# Altium PCB acqboard.PcbDoc (part 4 of 5)
Units mil, origin at the board's own origin, x right, y up, seen from the top; angles counter-clockwise.
Board outline 7000 x 5250 mil, 4 copper layers (Top Layer, Internal Plane 1, Internal Plane 2, Bottom Layer); 629 components, 384 nets, 2086 pads, 785 vias.
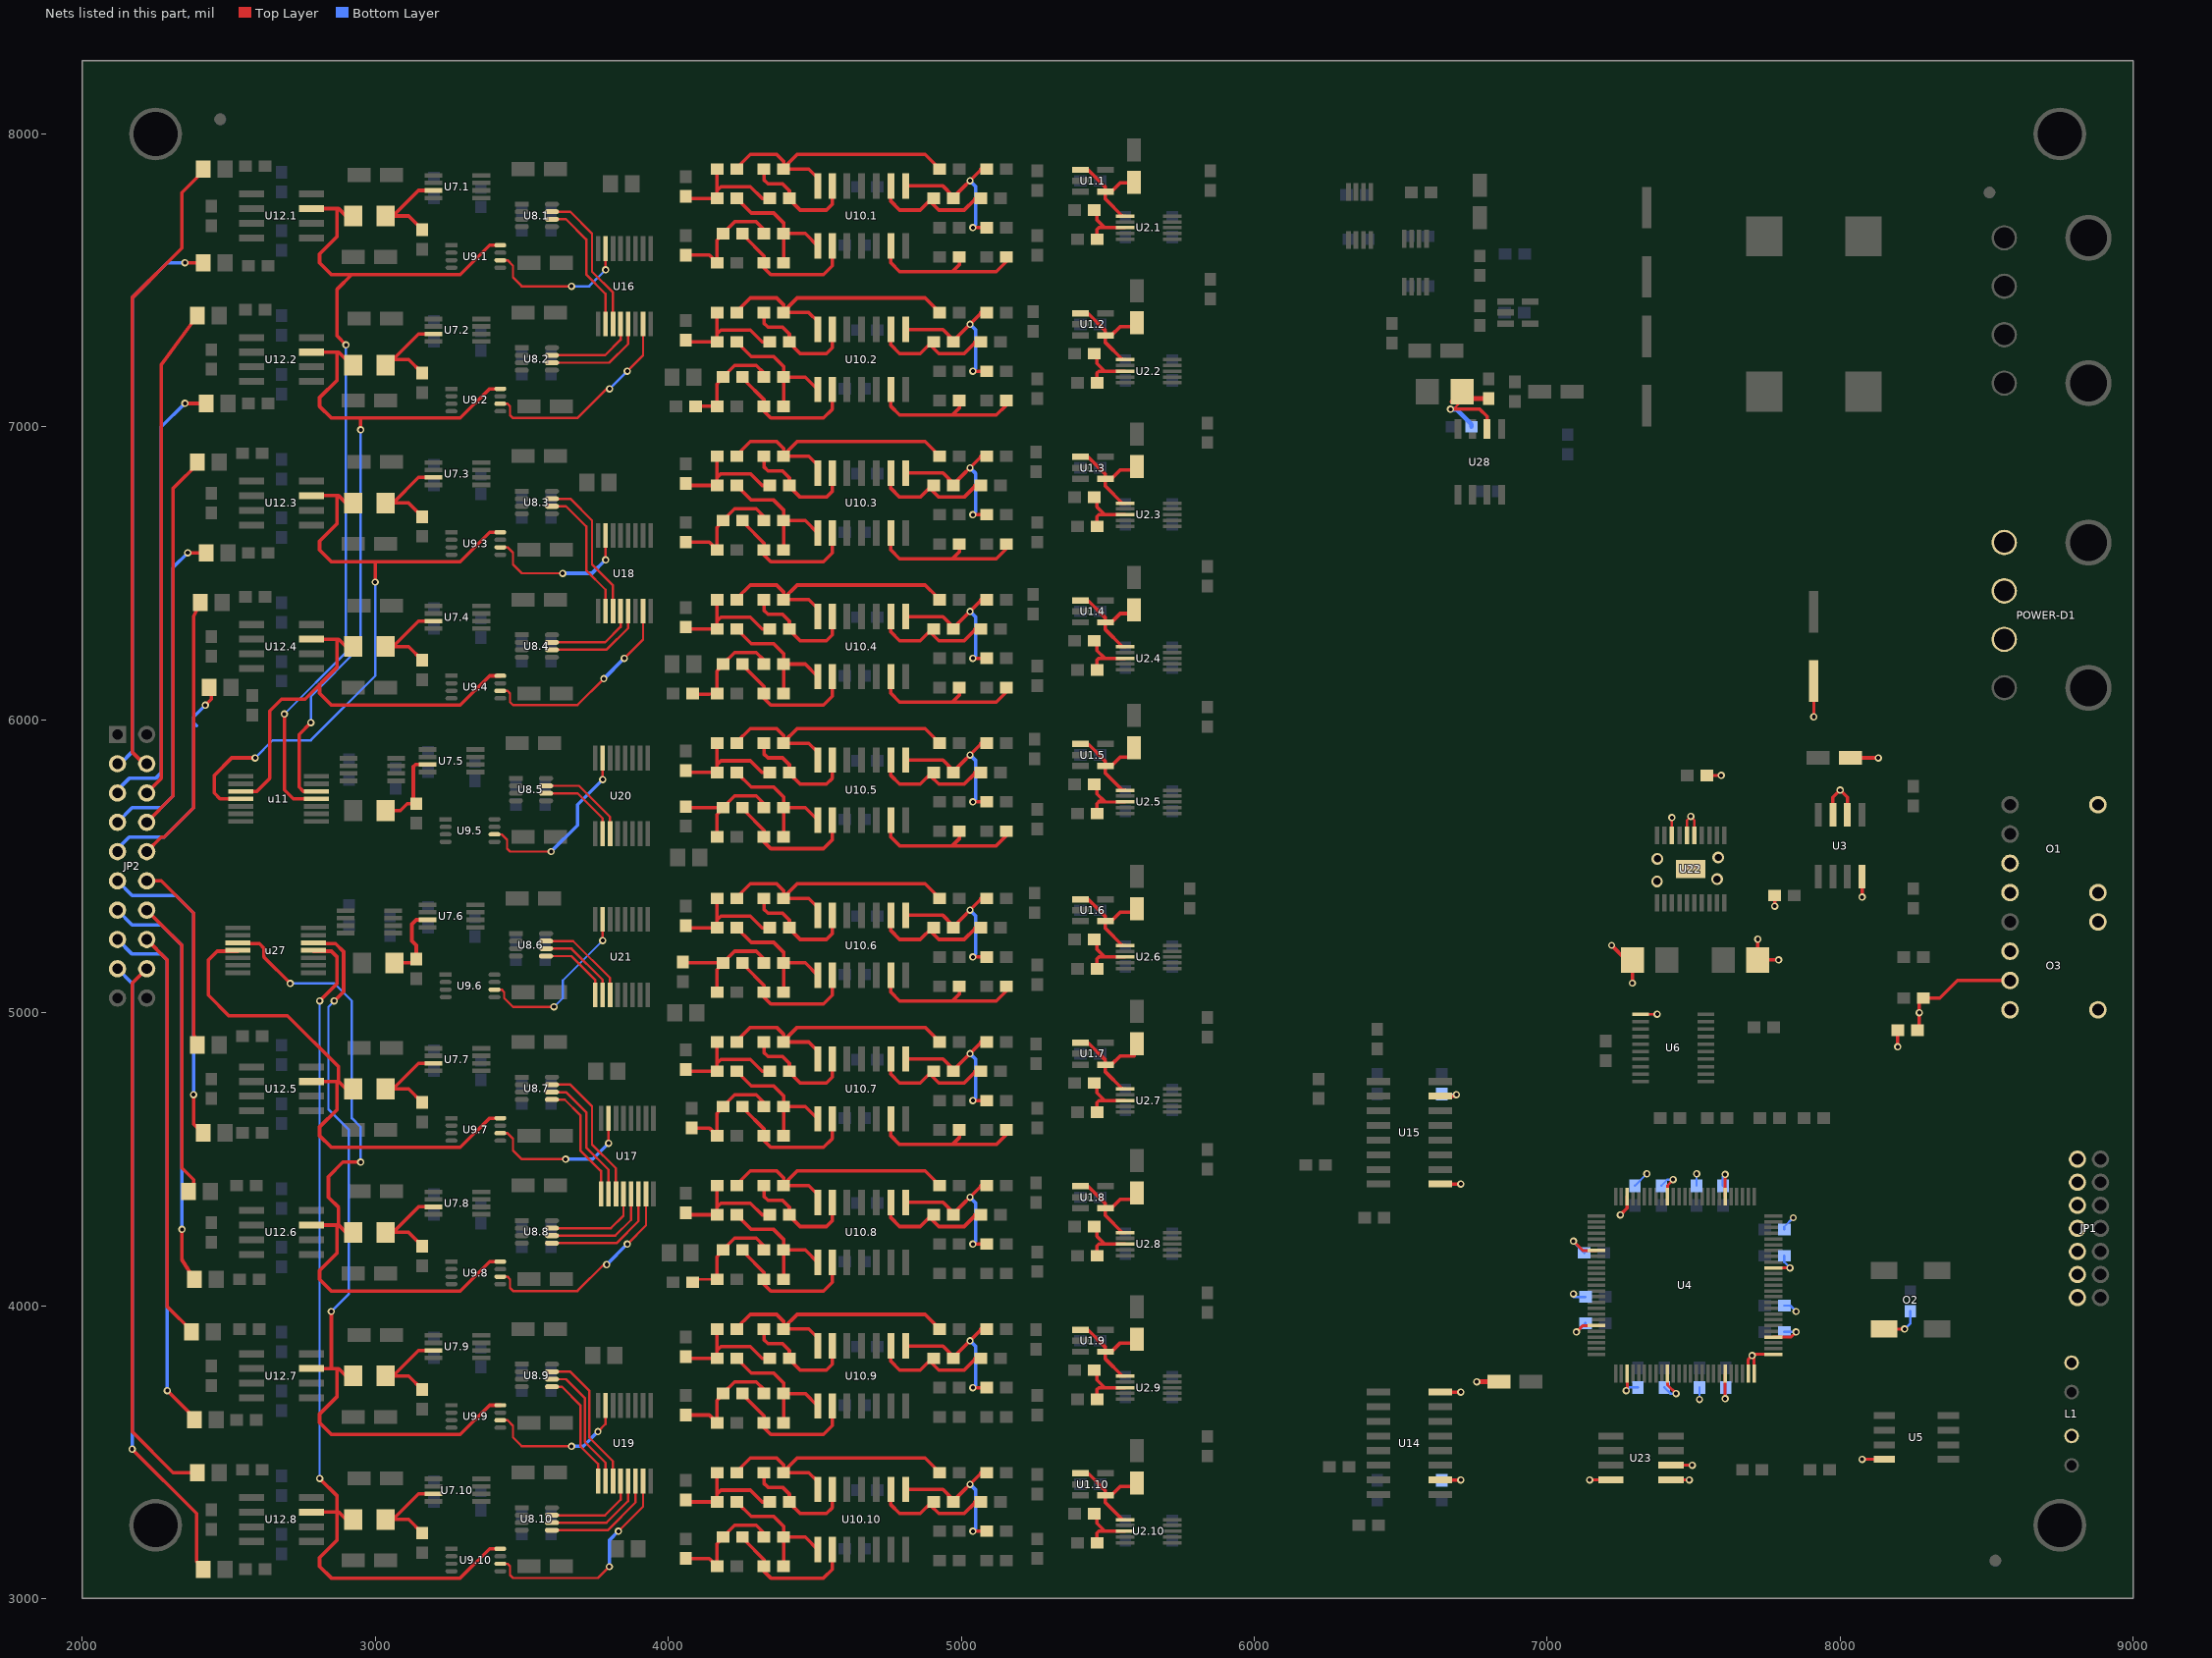
[diagram p6: the nets of this part, all layers, seen from the top]

## Via types
v1: diameter 25, hole 13.5, Top Layer to Bottom Layer, 768 vias
v2: diameter 40, hole 20, Top Layer to Bottom Layer, 13 vias
v3: diameter 40, hole 25, Top Layer to Bottom Layer, 4 vias

## Nets (pads, with @x,y where several pads share a name; then routed paths per layer and width w, separated by ;. In a path a pad name is that pad's centre, name@x,y a point inside that pad or via, vN(x,y) a via of type N, cw(c..) or ccw(c..) an arc to the next point about the centre after c; other vN are vias at no path point) (continued)
GA6: U8.6.5 U21.1 | length 252.3
  Top Layer w8: U8.6.5@3583.15,5193.23 3670,5193.23 3750.43,5112.8 U21.1@3750.43,5061.06
GA7: U8.7.5 U17.1 | length 417
  Top Layer w8: U8.7.5@3603.15,4703.23 3646.77,4703.23 3700,4650 3700,4530 3770.43,4459.57 U17.1@3770.43,4381.06
GA8: U8.8.5 U17.6 | length 419
  Top Layer w8: U8.8.5@3603.15,4213.23 3823.23,4213.23 3898.39,4288.39 U17.6@3898.39,4381.06
GA9: U8.9.5 U19.1 | length 407
  Top Layer w8: U8.9.5@3603.15,3723.23 3636.77,3723.23 3700,3660 3700,3520 3760.43,3459.57 U19.1@3760.43,3401.06
GA10: U8.10.5 U19.6 | length 397.3
  Top Layer w8: U8.10.5@3603.15,3233.23 3793.23,3233.23 3888.39,3328.39 U19.6@3888.39,3401.06
GB1: U8.1.6 U16.2 | length 461.6
  Top Layer w8: U8.1.6@3603.15,7708.82 3651.18,7708.82 3720,7640 3720,7520 3786.02,7453.98 U16.2@3786.02,7351.06
GB2: U8.2.6 U16.5 | length 354.4
  Top Layer w8: U8.2.6@3603.15,7218.82 3798.82,7218.82 3862.8,7282.8 U16.5@3862.8,7351.06
GB3: U8.3.6 U18.2 | length 461.6
  Top Layer w8: U8.3.6@3603.15,6728.82 3651.18,6728.82 3720,6660 3720,6510 3786.02,6443.98 U18.2@3786.02,6371.06
GB4: U8.4.6 U18.5 | length 361.2
  Top Layer w8: U8.4.6@3590,6240 3790,6240 3862.8,6312.8 U18.5@3862.8,6371.06
GB5: U8.5.6 U20.2 | length 280.9
  Top Layer w8: U8.5.6@3583.15,5748.82 3691.18,5748.82 3776.02,5663.98 U20.2@3776.02,5611.06
GB6: U8.6.6 U21.2 | length 288.5
  Top Layer w8: U8.6.6@3583.15,5218.82 3670,5218.82 3776.02,5112.79 U21.2@3776.02,5061.06
GB7: U8.7.6 U17.2 | length 455.8
  Top Layer w8: U8.7.6@3603.15,4728.82 3651.18,4728.82 3720,4660 3720,4540 3796.02,4463.98 U17.2@3796.02,4381.06
GB8: U8.8.6 U17.5 | length 380.3
  Top Layer w8: U8.8.6@3603.15,4238.82 3818.82,4238.82 3872.8,4292.8 U17.5@3872.8,4381.06
GB9: U8.9.6 U19.2 | length 451.6
  Top Layer w8: U8.9.6@3603.15,3748.82 3651.18,3748.82 3715,3685 3715,3535 3786.02,3463.98 U19.2@3786.02,3401.06
GB10: U8.10.6 U19.5 | length 358.6
  Top Layer w8: U8.10.6@3603.15,3258.82 3788.82,3258.82 3862.8,3332.8 U19.5@3862.8,3401.06
GC1: U8.1.7 U16.3 | length 506.3
  Top Layer w8: U8.1.7@3603.15,7734.41 3665.59,7734.41 3740,7660 3740,7530 3811.61,7458.39 U16.3@3811.61,7351.06
GC2: U8.2.7 U16.4 | length 309.8
  Top Layer w8: U8.2.7@3603.15,7244.41 3784.41,7244.41 3837.2,7297.2 U16.4@3837.2,7351.06
GC3: U8.3.7 U18.3 | length 506.3
  Top Layer w8: U8.3.7@3603.15,6754.41 3665.59,6754.41 3740,6680 3740,6530 3811.61,6458.39 U18.3@3811.61,6371.06
GC4: U8.4.7 U18.4 | length 309.8
  Top Layer w8: U8.4.7@3603.15,6264.41 3784.41,6264.41 3837.2,6317.2 U18.4@3837.2,6371.06
GC5: U8.5.7 U20.3 | length 319.7
  Top Layer w8: U8.5.7@3583.15,5774.41 3695.59,5774.41 3801.61,5668.39 U20.3@3801.61,5611.06
GC6: U8.6.7 U21.3 | length 328
  Top Layer w8: U8.6.7@3583.15,5244.41 3675.59,5244.41 3801.61,5118.39 U21.3@3801.61,5061.06
GC7: U8.7.7 U17.3 | length 500.4
  Top Layer w8: U8.7.7@3603.15,4754.41 3665.59,4754.41 3740,4680 3740,4550 3821.61,4468.39 U17.3@3821.61,4381.06
GC8: U8.8.7 U17.4 | length 335.6
  Top Layer w8: U8.8.7@3603.15,4264.41 3804.41,4264.41 3847.2,4307.2 U17.4@3847.2,4381.06
GC9: U8.9.7 U19.3 | length 496.3
  Top Layer w8: U8.9.7@3603.15,3774.41 3665.59,3774.41 3730,3710 3730,3550 3811.61,3468.39 U19.3@3811.61,3401.06
GC10: U8.10.7 U19.4 | length 319.8
  Top Layer w8: U8.10.7@3603.15,3284.41 3784.41,3284.41 3837.2,3337.2 U19.4@3837.2,3401.06
GND: C8.2 C9.2 C10.2 C11.2 C12.2 C13.2 C14.2 C15.2 C16.2 C17.2 C18.2 C19.2 C20.2 C21.2 C22.2 C23.2 C24.2 C25.2 C26.2 C50.1 C52.1 C53.2 C61.2 C62.2 C67.2 C68.2 JP1.1 JP1.3 JP1.5 JP1.7 JP1.9 JP1.11 JP1.13 L1.2 L1.4 O1.3 O1.4 O1.5 O1.8 O2.4 O3.2 O3.4 O3.5 O3.8 POWER-D1.1 POWER-D1.2 POWER-D1.3 U3.4 U3.6 U3.7 U4.3 U4.10 U4.20 U4.24 U4.25 U4.26 U4.29 U4.41 U4.56 U4.66 U4.73 U4.82 U4.95 U5.4 U6.11 U14.2 U14.8 U15.9 U15.15 U22.5 U22.6 U22.8 U22.P1 U23.1 U23.2 U23.8 | length 3729.8
  Top Layer w8: U6.11@7318.78,4995.16 v1(7375.16,4995.16) ; U22.8@7425.8,5605 v1(7425.8,5665.8) ; U22.6@7477,5605 7477,5657 v1(7490,5670) 7502.6,5657.4 U22.5@7502.6,5605
  Top Layer w10: v1(7090,4220) 7121.89,4188.11 U4.82@7167.83,4188.11 ; v1(7100,3910) 7122.2,3932.2 U4.95@7167.83,3932.2 ; v1(7145,3405) U23.8@7217.64,3405 ; v1(7270,3710) 7273.15,3713.15 U4.3@7273.15,3767.83 ; U4.10@7410.94,3767.83 7410.94,3729.06 v1(7440,3700) ; U4.66@7410.94,4372.17 7410.94,4410.94 v1(7430,4430) ; U23.1@7422.36,3405 v1(7485,3405) ; U23.2@7422.36,3455 v1(7495,3455) ; C53.2@7545.46,5810 v1(7594,5810) ; v1(7607.8,3682.2) U4.20@7607.8,3767.83 ; U4.56@7607.8,4372.17 v1(7607.8,4447.8) ; U4.24@7686.54,3767.83 7686.54,3816.54 7703.78,3833.78 U4.26@7772.17,3833.78 ; v1(7700,3830) 7706.22,3823.78 U4.25@7706.22,3767.83 ; U4.29@7772.17,3892.83 7832.83,3892.83 v1(7850,3910) ; U4.41@7772.17,4129.06 v1(7829.06,4129.06) ; v1(7910,6010) C61.2@7910,6131.89 ; v1(8075,3475) U5.4@8150.75,3475 ; O2.4@8150,3920 v1(8220,3920)
  Top Layer w12: U14.2@6635.31,3405 v1(6705,3405) ; U14.8@6635.31,3705 v1(6705,3705) ; U15.9@6635.31,4415 v1(6705,4415) ; U15.15@6635.31,4715 6685,4715 v1(6690,4720) ; v1(7220,5230) 7270,5180 C68.2@7290.94,5180 v1(7290.94,5100.94) ; v1(7250,4310) 7273.15,4333.15 U4.73@7273.15,4372.17 ; v1(7719.06,5250.94) C67.2@7719.06,5180 v1(7790,5180) ; v1(7776.54,5363.46) C8.2@7776.54,5400 ; U3.7@7975,5675.31 7975,5735 v1(8000,5760) 8025,5735 U3.6@8025,5675.31 ; C11.2@8039.06,5870 v1(8130,5870) ; v1(8075,5395) U3.4@8075,5464.69 ; v1(8196.54,4883.46) C10.2@8196.54,4940
  Top Layer w16: v1(6760,3740) C62.2@6830.94,3740
  Bottom Layer w8: C52.1@6640,3403.46 6703.46,3403.46 v1(6705,3405) ; C50.1@6640,4722.22 6642.22,4720 v1(6690,4720) ; v1(6705,4415) v1@6710,4410 ; v1@7090,4030 C22.2@7130.85,4030 ; v1(7090,4220) 7090,4216.54 C12.2@7126.54,4180 ; v1(7100,3910) 7100.85,3910 C13.2@7130.85,3940 ; v1(7270,3710) 7280.85,3720.85 C14.2@7310,3720.85 ; C19.2@7300,4409.15 7300,4410 v1(7340,4450) ; C23.2@7390,4409.15 7390,4410 7410,4430 v1(7430,4430) ; C26.2@7400,3720.85 7420.85,3700 v1(7440,3700) ; v1(7495,3455) v1@7500,3450 ; C24.2@7510,4409.15 v1(7510,4450) ; v1(7520,3680) C21.2@7520,3720.85 ; C18.2@7600,4409.15 7600,4440 v1(7607.8,4447.8) ; v1(7607.8,3682.2) 7610,3684.41 C15.2@7610,3720.85 ; C16.2@7809.15,3910 v1(7850,3910) ; C25.2@7809.15,4000 7830,4000 v1(7850,3980) ; C20.2@7809.15,4170 7809.15,4148.96 v1(7829.06,4129.06) ; C17.2@7809.15,4260 7809.15,4269.15 v1(7840,4300) ; v1@8070,3470 v1(8075,3475) ; v1(8220,3920) 8240,3940 C9.2@8240,3980.85
  other v1: 7090,4040
  other v3: 7375,5448 7580,5456 7376,5525 7584,5530
H0: U9.1.6 U16.15 | length 515.4
  Top Layer w8: U9.1.6@3426.93,7568.82 3451.18,7568.82 3470,7550 3470,7510 3500,7480 v1(3670,7480) ; v1(3786.02,7536.02) U16.15@3786.02,7608.94
  Bottom Layer w8: v1(3670,7480) 3730,7480 v1(3786.02,7536.02)
H1: U9.2.6 U16.7 | length 720.6
  Top Layer w8: U9.2.6@3426.93,7078.82 3451.18,7078.82 3460,7070 3460,7040 3470,7030 3690,7030 3790,7130 v1(3800,7130) ; v1(3860,7190) 3913.98,7243.98 U16.7@3913.98,7351.06
  Bottom Layer w8: v1(3800,7130) v1(3860,7190)
H2: U9.3.6 U18.15 | length 521.3
  Top Layer w8: U9.3.6@3426.93,6588.82 3451.18,6588.82 3470,6570 3470,6530 3500,6500 v1(3640,6500) ; v1(3786.02,6546.02) U18.15@3786.02,6628.94
  Bottom Layer w12: v1(3640,6500) 3740,6500 v1(3786.02,6546.02)
H3: U9.4.6 U18.7 | length 714.7
  Top Layer w8: U9.4.6@3426.93,6098.82 3451.18,6098.82 3460,6090 3460,6060 3470,6050 3690,6050 v1(3780,6140) ; v1(3850,6210) 3913.98,6273.98 U18.7@3913.98,6371.06
  Bottom Layer w12: v1(3780,6140) v1(3850,6210)
H4: U9.5.6 U20.15 | length 626.9
  Top Layer w8: U9.5.6@3406.93,5608.82 3431.18,5608.82 3450,5590 3450,5560 3460,5550 v1(3600,5550) ; v1(3776.02,5796.02) U20.15@3776.02,5868.94
  Bottom Layer w12: v1(3600,5550) 3690,5640 3690,5710 v1(3776.02,5796.02)
H5: U9.6.6 U21.15 | length 606.9
  Top Layer w8: U9.6.6@3406.93,5078.82 3431.18,5078.82 3440,5070 3440,5050 3470,5020 v1(3610,5020) ; v1(3776.02,5246.02) U21.15@3776.02,5318.94
  Bottom Layer w8: v1(3610,5020) 3640,5050 3640,5110 v1(3776.02,5246.02)
H6: U9.7.6 U17.15 | length 536.6
  Top Layer w8: U9.7.6@3426.93,4588.82 3451.18,4588.82 3470,4570 3470,4530 3500,4500 v1(3650,4500) ; v1(3796.02,4553.98) U17.15@3796.02,4638.94
  Bottom Layer w12: v1(3650,4500) 3742.05,4500 v1(3796.02,4553.98)
H7: U9.8.6 U17.7 | length 734.7
  Top Layer w8: U9.8.6@3426.93,4098.82 3451.18,4098.82 3460,4090 3460,4060 3470,4050 3690,4050 3780,4140 v1(3790,4140) ; v1(3860,4210) 3923.98,4273.98 U17.7@3923.98,4381.06
  Bottom Layer w12: v1(3790,4140) v1(3860,4210)
H8: U9.9.6 U19.15 | length 513.7
  Top Layer w8: U9.9.6@3426.93,3608.82 3451.18,3608.82 3470,3590 3470,3550 3500,3520 v1(3670,3520) ; v1(3760,3570) 3786.02,3596.02 U19.15@3786.02,3658.94
  Bottom Layer w12: v1(3670,3520) 3710,3520 v1(3760,3570)
H9: U9.10.6 U19.7 | length 765.7
  Top Layer w8: U9.10.6@3426.93,3118.82 3451.18,3118.82 3460,3110 3460,3080 3470,3070 3760,3070 v1(3798.75,3108.75) ; v1(3830,3230) 3913.98,3313.98 U19.7@3913.98,3401.06
  Bottom Layer w12: v1(3798.75,3108.75) 3798.75,3198.75 v1(3830,3230)
IN+1: C65.1.1 JP2.4 | length 2176
  Top Layer w8: C65.1.1@2426.54,7856.54 C65.1.1@2426.54,7870
  Top Layer w12: JP2.4@2220,5850 2210,5850 2170,5890 2170,7440 2340,7610 2340,7800 2410,7870 C65.1.1@2426.54,7870
IN+2: C65.2.1 JP2.6 | length 1691
  Top Layer w12: JP2.6@2220,5750 2270,5800 2270,7213.46 C65.2.1@2392.6,7380
IN+3: C65.3.1 JP2.8 | length 1304.6
  Top Layer w12: JP2.8@2220,5650 2310,5740 2310,6790 C65.3.1@2400,6880
IN+4: C65.4.1 JP2.10 | length 927.3
  Top Layer w12: JP2.10@2220,5550 2270,5600 2280,5600 2380,5700 2380,6353.46 C65.4.1@2402.6,6400
IN+5: C65.5.1 JP2.12 | length 657.7
  Top Layer w12: JP2.12@2220,5450 2270,5450 2380,5340 2380,4926.54 C65.5.1@2392.6,4890
IN+6: C65.6.1 JP2.14 | length 1036.3
  Top Layer w12: JP2.14@2220,5350 2340,5230 2340,4470 2380,4430 C65.6.1@2380,4380
IN+7: C65.7.1 JP2.16 | length 1404.8
  Top Layer w12: JP2.16@2220,5250 2290,5180 2290,3996.54 C65.7.1@2376.54,3910
IN+8: C65.8.1 JP2.18 | length 1885.2
  Top Layer w12: JP2.18@2220,5150 2170,5100 2170,3570 2310,3430 C65.8.1@2396.54,3430
IN-1: C73.1.1 JP2.3 | length 1922.8
  Top Layer w12: v1(2350,7560) C73.1.1@2426.54,7560
  Bottom Layer w12: JP2.3@2120,5850 2130,5850 2170,5890 2170,7440 2290,7560 v1(2350,7560)
IN-2: C73.2.1 JP2.5 | length 1558.7
  Top Layer w12: v1(2350,7080) C73.2.1@2426.54,7080
  Bottom Layer w12: JP2.5@2110,5750 2160,5800 2250,5800 2270,5820 2270,7000 v1(2350,7080)
IN-3: C73.3.1 JP2.7 | length 1144.5
  Top Layer w12: v1(2360,6570) C73.3.1@2426.54,6570
  Bottom Layer w12: JP2.7@2120,5650 2170,5700 2270,5700 2310,5740 2310,6520 v1(2360,6570)
IN-4: C73.4.1 JP2.9 | length 777
  Top Layer w12: v1(2420,6050) 2440,6070 C73.4.1@2440,6110
  Bottom Layer w12: JP2.9@2120,5550 2120,5560 2160,5600 2280,5600 2380,5700 2380,6010 v1(2420,6050) ; 2380,5990 2390,5980
IN-5: C73.5.1 JP2.11 | length 1068
  Top Layer w12: v1(2380,4720) 2380,4620 C73.5.1@2410,4590
  Bottom Layer w12: JP2.11@2120,5450 2170,5400 2320,5400 2380,5340 v1(2380,4720)
IN-6: C73.6.1 JP2.13 | length 1432.2
  Top Layer w12: v1(2340,4260) 2340,4156.54 C73.6.1@2382.6,4090
  Bottom Layer w12: JP2.13@2120,5350 2170,5300 2270,5300 2340,5230 v1@2340,4250
IN-7: C73.7.1 JP2.15 | length 1810.4
  Top Layer w12: v1(2290,3710) C73.7.1@2390,3610
  Bottom Layer w12: JP2.15@2120,5250 2170,5200 2270,5200 2290,5180 v1(2290,3710)
IN-8: C73.8.1 JP2.17 | length 2172.8
  Top Layer w12: v1(2170,3510) 2390,3290 2390,3126.54 C73.8.1@2416.54,3100
  Bottom Layer w12: JP2.17@2120,5150 2170,5100 v1(2170,3510)
INAOUT1: C30.1.2 U9.1.8 u11.4 U12.1.7 | length 3060.8
  Top Layer w12: v1(2690,6020) 2690,5760 2720,5730 u11.4@2798.94,5730 ; U12.1.7@2782.36,7745 2875,7745 2900,7720 C30.1.2@2946.54,7720 ; 2870,7745 2870,7650 2810,7590 2810,7560 2850,7520 3290,7520 3390,7620 U9.1.8@3426.93,7620 ; v1(2900,7280) 2870,7310 2870,7470 2920,7520
  Bottom Layer w8: v1(2690,6020) 2900,6230 v1(2900,7280)
INAOUT2: C30.2.2 U9.2.8 u11.5 U12.2.7 | length 2471.2
  Top Layer w12: v1(2780,5990) 2740,5950 2740,5770 2754.41,5755.59 u11.5@2798.94,5755.59 ; U12.2.7@2782.36,7255 2875,7255 2900,7230 C30.2.2@2946.54,7230 ; 2870,7255 2870,7160 2810,7100 2810,7070 2850,7030 3290,7030 3390,7130 U9.2.8@3426.93,7130 ; v1(2950,6990) 2950,7030
  Bottom Layer w8: v1(2780,5990) 2780,6080 2950,6250 v1(2950,6990)
INAOUT3: C30.3.2 U9.3.8 u11.11 U12.3.7 | length 2299.5
  Top Layer w12: u11.11@2541.06,5730 2470,5730 2450,5750 2450,5810 2510,5870 v1(2590,5870) ; U12.3.7@2782.36,6765 2875,6765 2900,6740 C30.3.2@2946.54,6740 ; 2870,6765 2870,6670 2810,6610 2810,6580 2850,6540 3290,6540 3390,6640 U9.3.8@3426.93,6640 ; v1(3000,6470) 3000,6540
  Bottom Layer w8: v1(2590,5870) 2650,5930 2780,5930 3000,6150 v1(3000,6470)
INAOUT4: C30.4.2 U9.4.8 u11.10 U12.4.7 | length 1613.9
  Top Layer w12: u11.10@2541.06,5755.59 2595.59,5755.59 2640,5800 2640,6030 2680,6070 2760,6070 2870,6180 2870,6275 ; U12.4.7@2782.36,6275 2875,6275 2900,6250 C30.4.2@2946.54,6250 ; 2810,6120 2810,6090 2850,6050 3290,6050 3390,6150 U9.4.8@3426.93,6150
INAOUT5: C30.7.2 U9.7.8 U12.5.7 u27.11 | length 1889.3
  Top Layer w12: u27.11@2531.06,5210 2460,5210 2430,5180 2430,5060 2500,4990 2700,4990 2875,4815 2875,4765 ; U12.5.7@2782.36,4765 2875,4765 ; 2870,4765 2870,4670 2810,4610 2810,4580 2850,4540 3290,4540 3390,4640 U9.7.8@3426.93,4640 ; C30.7.2@2946.54,4740 2900,4740 2875,4765
INAOUT6: C30.8.2 U9.8.8 U12.6.7 u27.10 | length 2419.5
  Top Layer w12: u27.10@2531.06,5235.59 2604.41,5235.59 2620,5220 2620,5190 v1(2710,5100) ; U12.6.7@2782.36,4275 2875,4275 ; 2870,4275 2870,4180 2810,4120 2810,4090 2850,4050 3290,4050 3390,4150 U9.8.8@3426.93,4150 ; C30.8.2@2946.54,4250 2900,4250 2875,4275 ; v1(2950,4490) 2890,4490 2840,4440 2840,4370 2875,4335 2875,4275
  Bottom Layer w8: v1(2710,5100) 2860,5100 2920,5040 2920,4640 2950,4610 v1(2950,4490)
INAOUT7: C30.9.2 U9.9.8 U12.7.7 u27.5 | length 2672.1
  Top Layer w12: U12.7.7@2782.36,3785 2875,3785 2900,3760 C30.9.2@2946.54,3760 ; u27.5@2788.94,5235.59 2864.41,5235.59 2891.88,5208.12 2891.88,5071.88 v1(2860,5040) ; 2850,3785 v1(2850,3980) ; 2870,3785 2870,3690 2810,3630 2810,3600 2850,3560 3290,3560 3390,3660 U9.9.8@3426.93,3660
  Bottom Layer w8: v1(2850,3980) 2910,4040 2910,4600 2840,4670 2840,5020 v1(2860,5040)
INAOUT8: C30.10.2 U9.10.8 U12.8.7 u27.4 | length 3093.4
  Top Layer w12: U12.8.7@2782.36,3295 2875,3295 2900,3270 C30.10.2@2946.54,3270 ; u27.4@2788.94,5210 2850,5210 2870,5190 2870,5100 v1(2810,5040) ; v1(2810,3410) 2870,3350 2870,3200 2810,3140 2810,3110 2850,3070 3290,3070 3390,3170 U9.10.8@3426.93,3170
  Bottom Layer w8: v1(2810,3410) v1(2810,5040)
NetC2.1_1: C2.1.1 U1.1.1 U1.1.4 U2.1.1 | length 350.6
  Top Layer w12: U1.1.1@5407.68,7877.4 5432.6,7877.4 5492.32,7817.68 5492.32,7777.68 5550.63,7719.37 U2.1.1@5559.29,7719.37 ; U1.1.4@5492.32,7802.6 5512.6,7802.6 5542.6,7832.6 C2.1.1@5590,7832.6
NetC2.2_1: C2.2.1 U1.2.1 U1.2.4 U2.2.1 | length 350.6
  Top Layer w12: U1.2.1@5407.68,7387.4 5432.6,7387.4 5492.32,7327.68 5492.32,7287.68 5550.63,7229.37 U2.2.1@5559.29,7229.37 ; U1.2.4@5492.32,7312.6 5512.6,7312.6 5542.6,7342.6 C2.2.1@5590,7342.6
NetC2.3_1: C2.3.1 U1.3.1 U1.3.4 U2.3.1 | length 350.6
  Top Layer w12: U1.3.1@5407.68,6897.4 5432.6,6897.4 5492.32,6837.68 5492.32,6797.68 5550.63,6739.37 U2.3.1@5559.29,6739.37 ; U1.3.4@5492.32,6822.6 5512.6,6822.6 5542.6,6852.6 C2.3.1@5590,6852.6
NetC2.4_1: C2.4.1 U1.4.1 U1.4.4 U2.4.1 | length 350.6
  Top Layer w12: U1.4.1@5407.68,6407.4 5432.6,6407.4 5492.32,6347.68 5492.32,6307.68 5550.63,6249.37 U2.4.1@5559.29,6249.37 ; U1.4.4@5492.32,6332.6 5512.6,6332.6 5542.6,6362.6 C2.4.1@5590,6362.6
NetC2.5_1: C2.5.1 U1.5.1 U1.5.4 U2.5.1 | length 350.6
  Top Layer w12: U1.5.1@5407.68,5917.4 5432.6,5917.4 5492.32,5857.68 5492.32,5817.68 5550.63,5759.37 U2.5.1@5559.29,5759.37 ; U1.5.4@5492.32,5842.6 5512.6,5842.6 5542.6,5872.6 C2.5.1@5590,5872.6
NetC2.6_1: C2.6.1 U1.6.1 U1.6.4 U2.6.1 | length 350.6
  Top Layer w12: U1.6.1@5407.68,5387.4 5432.6,5387.4 5492.32,5327.68 5492.32,5287.68 5550.63,5229.37 U2.6.1@5559.29,5229.37 ; U1.6.4@5492.32,5312.6 5512.6,5312.6 5542.6,5342.6 C2.6.1@5590,5342.6
NetC2.7_1: C2.7.1 U1.7.1 U1.7.4 U2.7.1 | length 350.6
  Top Layer w12: U1.7.1@5407.68,4897.4 5432.6,4897.4 5492.32,4837.68 5492.32,4797.68 5550.63,4739.37 U2.7.1@5559.29,4739.37 ; U1.7.4@5492.32,4822.6 5512.6,4822.6 5542.6,4852.6 5590,4852.6
NetC2.8_1: C2.8.1 U1.8.1 U1.8.4 U2.8.1 | length 350.6
  Top Layer w12: U1.8.1@5407.68,4407.4 5432.6,4407.4 5492.32,4347.68 5492.32,4307.68 5550.63,4249.37 U2.8.1@5559.29,4249.37 ; U1.8.4@5492.32,4332.6 5512.6,4332.6 5542.6,4362.6 C2.8.1@5590,4362.6
NetC2.9_1: C2.9.1 U1.9.1 U1.9.4 U2.9.1 | length 350.6
  Top Layer w12: U1.9.1@5407.68,3917.4 5432.6,3917.4 5492.32,3857.68 5492.32,3817.68 5550.63,3759.37 U2.9.1@5559.29,3759.37 ; U1.9.4@5492.32,3842.6 5512.6,3842.6 5542.6,3872.6 C2.9.1@5590,3872.6
NetC2.10_1: C2.10.1 U1.10.1 U1.10.4 U2.10.1 | length 350.6
  Top Layer w12: U1.10.1@5407.68,3427.4 5432.6,3427.4 5492.32,3367.68 5492.32,3327.68 5550.63,3269.37 U2.10.1@5559.29,3269.37 ; U1.10.4@5492.32,3352.6 5512.6,3352.6 5542.6,3382.6 C2.10.1@5590,3382.6
NetC4.1_2: C4.1.2 R30.1.2 U2.1.3 | length 203
  Top Layer w12: C4.1.2@5463.46,7640 5463.46,7673.46 5470,7680 U2.1.3@5559.29,7680 ; R30.1.2@5463.46,7740 5463.46,7706.54 5490,7680
NetC4.2_2: C4.2.2 R30.2.2 U2.2.3 | length 203
  Top Layer w12: C4.2.2@5463.46,7150 5463.46,7183.46 5470,7190 U2.2.3@5559.29,7190 ; R30.2.2@5463.46,7250 5463.46,7216.54 5490,7190
NetC4.3_2: C4.3.2 R30.3.2 U2.3.3 | length 203
  Top Layer w12: C4.3.2@5463.46,6660 5463.46,6693.46 5470,6700 U2.3.3@5559.29,6700 ; R30.3.2@5463.46,6760 5463.46,6726.54 5490,6700
NetC4.4_2: C4.4.2 R30.4.2 U2.4.3 | length 203
  Top Layer w12: C4.4.2@5463.46,6170 5463.46,6203.46 5470,6210 U2.4.3@5559.29,6210 ; R30.4.2@5463.46,6270 5463.46,6236.54 5490,6210
NetC4.5_2: C4.5.2 R30.5.2 U2.5.3 | length 201
  Top Layer w10: 5480.94,5720 U2.5.3@5559.29,5720
  Top Layer w12: C4.5.2@5463.46,5680 5463.46,5713.46 5470,5720 ; R30.5.2@5463.46,5780 5463.46,5746.54 5489.06,5720.94 ; 5470.71,5720.94 5480.94,5720.94
NetC4.6_2: C4.6.2 R30.6.2 U2.6.3 | length 203
  Top Layer w12: C4.6.2@5463.46,5150 5463.46,5183.46 5470,5190 U2.6.3@5559.29,5190 ; R30.6.2@5463.46,5250 5463.46,5216.54 5490,5190
NetC4.7_2: C4.7.2 R30.7.2 U2.7.3 | length 203
  Top Layer w12: C4.7.2@5463.46,4660 5463.46,4693.46 5470,4700 U2.7.3@5559.29,4700 ; R30.7.2@5463.46,4760 5463.46,4726.54 5490,4700
NetC4.8_2: C4.8.2 R30.8.2 U2.8.3 | length 203
  Top Layer w12: C4.8.2@5463.46,4170 5463.46,4203.46 5470,4210 U2.8.3@5559.29,4210 ; R30.8.2@5463.46,4270 5463.46,4236.54 5490,4210
NetC4.9_2: C4.9.2 R30.9.2 U2.9.3 | length 203
  Top Layer w12: C4.9.2@5463.46,3680 5463.46,3713.46 5470,3720 U2.9.3@5559.29,3720 ; R30.9.2@5463.46,3780 5463.46,3746.54 5490,3720
NetC4.10_2: C4.10.2 R30.10.2 U2.10.3 | length 203
  Top Layer w12: C4.10.2@5463.46,3190 5463.46,3223.46 5470,3230 U2.10.3@5559.29,3230 ; R30.10.2@5463.46,3290 5463.46,3256.54 5490,3230
NetC7_1: C7.1 C47.1 R48.2 U28.6 | length 507.6
  Top Layer w8: v1@6680,7060 6700,7080 C7.1@6700,7100 ; C7.1@6709.06,7099.06 C7.1@6709.06,7120
  Top Layer w12: v1(6670,7060) 6770,7060 6795,7035 U28.6@6795,6992.2
  Top Layer w16: C7.1@6675,7085.94 C7.1@6709.06,7120 6732.52,7096.54 R48.2@6810,7096.54
  Bottom Layer w16: v1(6670,7060) 6690,7060 6741.72,7008.28 C47.1@6741.72,7000
NetC10_1: C10.1 O3.3 R4.2 | length 437
  Top Layer w12: C10.1@8270,4940 8270,5036.54 R4.2@8283.46,5050 8340,5050 8400,5110 O3.3@8580,5110
  other v1: 8270,5000
NetC30.1_1: C30.1.1 R13.1.2 U7.1.3 | length 340.2
  Top Layer w12: C30.1.1@3013.46,7720 3113.46,7720 R13.1.2@3160,7673.46 ; C30.1.1@3060,7720 3147.2,7807.2 U7.1.3@3198.31,7807.2
NetC30.2_1: C30.2.1 R13.2.2 U7.2.3 | length 340.2
  Top Layer w12: C30.2.1@3013.46,7230 3113.46,7230 R13.2.2@3160,7183.46 ; C30.2.1@3060,7230 3147.2,7317.2 U7.2.3@3198.31,7317.2
NetC30.3_1: C30.3.1 R13.3.2 U7.3.3 | length 340.2
  Top Layer w12: C30.3.1@3013.46,6740 3113.46,6740 R13.3.2@3160,6693.46 ; C30.3.1@3060,6740 3147.2,6827.2 U7.3.3@3198.31,6827.2
NetC30.4_1: C30.4.1 R13.4.2 U7.4.3 | length 340.2
  Top Layer w12: C30.4.1@3013.46,6250 3113.46,6250 R13.4.2@3160,6203.46 ; C30.4.1@3060,6250 3147.2,6337.2 U7.4.3@3198.31,6337.2
NetC30.5_1: C30.5.1 R13.5.2 U7.5.3 | length 296.6
  Top Layer w12: C30.5.1@3035.12,5690 3085,5690 3108.46,5713.46 R13.5.2@3140,5713.46 3130,5723.46 3130,5840 3137.2,5847.2 U7.5.3@3178.31,5847.2
NetC30.6_1: C30.6.1 R13.6.2 U7.6.3 | length 264.9
  Top Layer w12: C30.6.1@3065.12,5170 3126.54,5170 R13.6.2@3140,5183.46 3140,5230 3125,5245 3125,5302.2 3140,5317.2 U7.6.3@3178.31,5317.2
NetC30.7_1: C30.7.1 R13.7.2 U7.7.3 | length 340.2
  Top Layer w12: C30.7.1@3013.46,4740 3113.46,4740 R13.7.2@3160,4693.46 ; C30.7.1@3060,4740 3147.2,4827.2 U7.7.3@3198.31,4827.2
NetC30.8_1: C30.8.1 R13.8.2 U7.8.3 | length 340.2
  Top Layer w12: C30.8.1@3013.46,4250 3113.46,4250 R13.8.2@3160,4203.46 ; C30.8.1@3060,4250 3147.2,4337.2 U7.8.3@3198.31,4337.2
NetC30.9_1: C30.9.1 R13.9.2 U7.9.3 | length 340.2
  Top Layer w12: C30.9.1@3013.46,3760 3113.46,3760 R13.9.2@3160,3713.46 ; C30.9.1@3060,3760 3147.2,3847.2 U7.9.3@3198.31,3847.2
NetC30.10_1: C30.10.1 R13.10.2 U7.10.3 | length 340.2
  Top Layer w12: C30.10.1@3013.46,3270 3113.46,3270 R13.10.2@3160,3223.46 ; C30.10.1@3060,3270 3147.2,3357.2 U7.10.3@3198.31,3357.2
NetC35.1_1: C35.1.1 R14.1.1 R18.1.1 U10.1.1 | length 458.7
  Top Layer w12: R18.1.1@4233.46,7780 4283.46,7730 4360,7730 4393.46,7696.54 C35.1.1@4393.46,7560 ; R14.1.1@4400,7660 4467.64,7660 U10.1.1@4510,7617.64
NetC35.1_2: C35.1.2 R17.1.2 U10.1.2 | length 459.7
  Top Layer w12: R17.1.2@4250,7650 4260,7650 4326.54,7583.46 4326.54,7543.46 4350,7520 4530,7520 4560,7550 U10.1.2@4560,7610
NetC35.2_1: C35.2.1 R14.2.1 R18.2.1 U10.2.1 | length 458.7
  Top Layer w12: R18.2.1@4233.46,7290 4283.46,7240 4360,7240 4393.46,7206.54 C35.2.1@4393.46,7070 ; R14.2.1@4400,7170 4467.64,7170 U10.2.1@4510,7127.64
NetC35.2_2: C35.2.2 R17.2.2 U10.2.2 | length 459.7
  Top Layer w12: R17.2.2@4250,7160 4260,7160 4326.54,7093.46 4326.54,7053.46 4350,7030 4530,7030 4560,7060 U10.2.2@4560,7120
NetC35.3_1: C35.3.1 R14.3.1 R18.3.1 U10.3.1 | length 458.7
  Top Layer w12: R18.3.1@4233.46,6800 4283.46,6750 4360,6750 4393.46,6716.54 C35.3.1@4393.46,6580 ; R14.3.1@4400,6680 4467.64,6680 U10.3.1@4510,6637.64
NetC35.3_2: C35.3.2 R17.3.2 U10.3.2 | length 459.7
  Top Layer w12: R17.3.2@4250,6670 4260,6670 4326.54,6603.46 4326.54,6563.46 4350,6540 4530,6540 4560,6570 U10.3.2@4560,6630
NetC35.4_1: C35.4.1 R14.4.1 R18.4.1 U10.4.1 | length 458.7
  Top Layer w12: R18.4.1@4233.46,6310 4283.46,6260 4360,6260 4393.46,6226.54 C35.4.1@4393.46,6090 ; R14.4.1@4400,6190 4467.64,6190 U10.4.1@4510,6147.64
NetC35.4_2: C35.4.2 R17.4.2 U10.4.2 | length 459.7
  Top Layer w12: R17.4.2@4250,6180 4260,6180 4326.54,6113.46 4326.54,6073.46 4350,6050 4530,6050 4560,6080 U10.4.2@4560,6140
NetC35.5_1: C35.5.1 R14.5.1 R18.5.1 U10.5.1 | length 458.7
  Top Layer w12: R18.5.1@4233.46,5820 4283.46,5770 4360,5770 4393.46,5736.54 C35.5.1@4393.46,5600 ; R14.5.1@4400,5700 4467.64,5700 U10.5.1@4510,5657.64
NetC35.5_2: C35.5.2 R17.5.2 U10.5.2 | length 459.7
  Top Layer w12: R17.5.2@4250,5690 4260,5690 4326.54,5623.46 4326.54,5583.46 4350,5560 4530,5560 4560,5590 U10.5.2@4560,5650
NetC35.6_1: C35.6.1 R14.6.1 R18.6.1 U10.6.1 | length 458.7
  Top Layer w12: R18.6.1@4233.46,5290 4283.46,5240 4360,5240 4393.46,5206.54 C35.6.1@4393.46,5070 ; R14.6.1@4400,5170 4467.64,5170 U10.6.1@4510,5127.64
NetC35.6_2: C35.6.2 R17.6.2 U10.6.2 | length 459.7
  Top Layer w12: R17.6.2@4250,5160 4260,5160 4326.54,5093.46 4326.54,5053.46 4350,5030 4530,5030 4560,5060 U10.6.2@4560,5120
NetC35.7_1: C35.7.1 R14.7.1 R18.7.1 U10.7.1 | length 458.7
  Top Layer w12: R18.7.1@4233.46,4800 4283.46,4750 4360,4750 4393.46,4716.54 C35.7.1@4393.46,4580 ; R14.7.1@4400,4680 4467.64,4680 U10.7.1@4510,4637.64
NetC35.7_2: C35.7.2 R17.7.2 U10.7.2 | length 459.7
  Top Layer w12: R17.7.2@4250,4670 4260,4670 4326.54,4603.46 4326.54,4563.46 4350,4540 4530,4540 4560,4570 U10.7.2@4560,4630
NetC35.8_1: C35.8.1 R14.8.1 R18.8.1 U10.8.1 | length 458.7
  Top Layer w12: R18.8.1@4233.46,4310 4283.46,4260 4360,4260 4393.46,4226.54 C35.8.1@4393.46,4090 ; R14.8.1@4400,4190 4467.64,4190 U10.8.1@4510,4147.64
NetC35.8_2: C35.8.2 R17.8.2 U10.8.2 | length 459.7
  Top Layer w12: R17.8.2@4250,4180 4260,4180 4326.54,4113.46 4326.54,4073.46 4350,4050 4530,4050 4560,4080 U10.8.2@4560,4140
NetC35.9_1: C35.9.1 R14.9.1 R18.9.1 U10.9.1 | length 458.7
  Top Layer w12: R18.9.1@4233.46,3820 4283.46,3770 4360,3770 4393.46,3736.54 C35.9.1@4393.46,3600 ; R14.9.1@4400,3700 4467.64,3700 U10.9.1@4510,3657.64
NetC35.9_2: C35.9.2 R17.9.2 U10.9.2 | length 459.7
  Top Layer w12: R17.9.2@4250,3690 4260,3690 4326.54,3623.46 4326.54,3583.46 4350,3560 4530,3560 4560,3590 U10.9.2@4560,3650
NetC35.10_1: C35.10.1 R14.10.1 R18.10.1 U10.10.1 | length 458.7
  Top Layer w12: R18.10.1@4233.46,3330 4283.46,3280 4360,3280 4393.46,3246.54 C35.10.1@4393.46,3110 ; R14.10.1@4400,3210 4467.64,3210 U10.10.1@4510,3167.64
NetC35.10_2: C35.10.2 R17.10.2 U10.10.2 | length 459.7
  Top Layer w12: R17.10.2@4250,3200 4260,3200 4326.54,3133.46 4326.54,3093.46 4350,3070 4530,3070 4560,3100 U10.10.2@4560,3160
NetC36.1_1: C36.1.1 R15.1.1 R22.1.1 U10.1.14 | length 934.5
  Top Layer w12: R15.1.1@4233.46,7880 4233.46,7883.46 4280,7930 4370,7930 4393.46,7906.54 C36.1.1@4393.46,7880 4480,7880 4510,7850 U10.1.14@4510,7822.36 ; C36.1.1@4393.46,7883.46 4440,7930 4876.54,7930 R22.1.1@4916.54,7890
NetC36.1_2: C36.1.2 R19.1.2 U10.1.13 | length 401.1
  Top Layer w12: C36.1.2@4326.54,7880 4326.54,7843.46 4340,7830 4390,7830 4413.46,7806.54 4413.46,7776.54 4450,7740 4540,7740 4560,7760 U10.1.13@4560,7822.36
NetC36.2_1: C36.2.1 R15.2.1 R22.2.1 U10.2.14 | length 934.5
  Top Layer w12: R15.2.1@4233.46,7390 4233.46,7393.46 4280,7440 4370,7440 4393.46,7416.54 C36.2.1@4393.46,7390 4480,7390 4510,7360 U10.2.14@4510,7332.36 ; C36.2.1@4393.46,7393.46 4440,7440 4876.54,7440 R22.2.1@4916.54,7400
NetC36.2_2: C36.2.2 R19.2.2 U10.2.13 | length 401.1
  Top Layer w12: C36.2.2@4326.54,7390 4326.54,7353.46 4340,7340 4390,7340 4413.46,7316.54 4413.46,7286.54 4450,7250 4540,7250 4560,7270 U10.2.13@4560,7332.36
NetC36.3_1: C36.3.1 R15.3.1 R22.3.1 U10.3.14 | length 934.5
  Top Layer w12: R15.3.1@4233.46,6900 4233.46,6903.46 4280,6950 4370,6950 4393.46,6926.54 C36.3.1@4393.46,6900 4480,6900 4510,6870 U10.3.14@4510,6842.36 ; C36.3.1@4393.46,6903.46 4440,6950 4876.54,6950 R22.3.1@4916.54,6910
NetC36.3_2: C36.3.2 R19.3.2 U10.3.13 | length 401.1
  Top Layer w12: C36.3.2@4326.54,6900 4326.54,6863.46 4340,6850 4390,6850 4413.46,6826.54 4413.46,6796.54 4450,6760 4540,6760 4560,6780 U10.3.13@4560,6842.36
NetC36.4_1: C36.4.1 R15.4.1 R22.4.1 U10.4.14 | length 934.5
  Top Layer w12: R15.4.1@4233.46,6410 4233.46,6413.46 4280,6460 4370,6460 4393.46,6436.54 C36.4.1@4393.46,6410 4480,6410 4510,6380 U10.4.14@4510,6352.36 ; C36.4.1@4393.46,6413.46 4440,6460 4876.54,6460 R22.4.1@4916.54,6420
NetC36.4_2: C36.4.2 R19.4.2 U10.4.13 | length 401.1
  Top Layer w12: C36.4.2@4326.54,6410 4326.54,6373.46 4340,6360 4390,6360 4413.46,6336.54 4413.46,6306.54 4450,6270 4540,6270 4560,6290 U10.4.13@4560,6352.36
NetC36.5_1: C36.5.1 R15.5.1 R22.5.1 U10.5.14 | length 934.5
  Top Layer w12: R15.5.1@4233.46,5920 4233.46,5923.46 4280,5970 4370,5970 4393.46,5946.54 C36.5.1@4393.46,5920 4480,5920 4510,5890 U10.5.14@4510,5862.36 ; C36.5.1@4393.46,5923.46 4440,5970 4876.54,5970 R22.5.1@4916.54,5930
NetC36.5_2: C36.5.2 R19.5.2 U10.5.13 | length 401.1
  Top Layer w12: C36.5.2@4326.54,5920 4326.54,5883.46 4340,5870 4390,5870 4413.46,5846.54 4413.46,5816.54 4450,5780 4540,5780 4560,5800 U10.5.13@4560,5862.36
NetC36.6_1: C36.6.1 R15.6.1 R22.6.1 U10.6.14 | length 934.5
  Top Layer w12: R15.6.1@4233.46,5390 4233.46,5393.46 4280,5440 4370,5440 4393.46,5416.54 C36.6.1@4393.46,5390 4480,5390 4510,5360 U10.6.14@4510,5332.36 ; C36.6.1@4393.46,5393.46 4440,5440 4876.54,5440 R22.6.1@4916.54,5400
NetC36.6_2: C36.6.2 R19.6.2 U10.6.13 | length 401.1
  Top Layer w12: C36.6.2@4326.54,5390 4326.54,5353.46 4340,5340 4390,5340 4413.46,5316.54 4413.46,5286.54 4450,5250 4540,5250 4560,5270 U10.6.13@4560,5332.36
NetC36.7_1: C36.7.1 R15.7.1 R22.7.1 U10.7.14 | length 934.5
  Top Layer w12: R15.7.1@4233.46,4900 4233.46,4903.46 4280,4950 4370,4950 4393.46,4926.54 C36.7.1@4393.46,4900 4480,4900 4510,4870 U10.7.14@4510,4842.36 ; C36.7.1@4393.46,4903.46 4440,4950 4876.54,4950 R22.7.1@4916.54,4910
NetC36.7_2: C36.7.2 R19.7.2 U10.7.13 | length 401.1
  Top Layer w12: C36.7.2@4326.54,4900 4326.54,4863.46 4340,4850 4390,4850 4413.46,4826.54 4413.46,4796.54 4450,4760 4540,4760 4560,4780 U10.7.13@4560,4842.36
NetC36.8_1: C36.8.1 R15.8.1 R22.8.1 U10.8.14 | length 934.5
  Top Layer w12: R15.8.1@4233.46,4410 4233.46,4413.46 4280,4460 4370,4460 4393.46,4436.54 C36.8.1@4393.46,4410 4480,4410 4510,4380 U10.8.14@4510,4352.36 ; C36.8.1@4393.46,4413.46 4440,4460 4876.54,4460 R22.8.1@4916.54,4420
NetC36.8_2: C36.8.2 R19.8.2 U10.8.13 | length 401.1
  Top Layer w12: C36.8.2@4326.54,4410 4326.54,4373.46 4340,4360 4390,4360 4413.46,4336.54 4413.46,4306.54 4450,4270 4540,4270 4560,4290 U10.8.13@4560,4352.36
NetC36.9_1: C36.9.1 R15.9.1 R22.9.1 U10.9.14 | length 934.5
  Top Layer w12: R15.9.1@4233.46,3920 4233.46,3923.46 4280,3970 4370,3970 4393.46,3946.54 C36.9.1@4393.46,3920 4480,3920 4510,3890 U10.9.14@4510,3862.36 ; C36.9.1@4393.46,3923.46 4440,3970 4876.54,3970 R22.9.1@4916.54,3930
NetC36.9_2: C36.9.2 R19.9.2 U10.9.13 | length 401.1
  Top Layer w12: C36.9.2@4326.54,3920 4326.54,3883.46 4340,3870 4390,3870 4413.46,3846.54 4413.46,3816.54 4450,3780 4540,3780 4560,3800 U10.9.13@4560,3862.36
NetC36.10_1: C36.10.1 R15.10.1 R22.10.1 U10.10.14 | length 934.5
  Top Layer w12: R15.10.1@4233.46,3430 4233.46,3433.46 4280,3480 4370,3480 4393.46,3456.54 C36.10.1@4393.46,3430 4480,3430 4510,3400 U10.10.14@4510,3372.36 ; C36.10.1@4393.46,3433.46 4440,3480 4876.54,3480 R22.10.1@4916.54,3440
NetC36.10_2: C36.10.2 R19.10.2 U10.10.13 | length 401.1
  Top Layer w12: C36.10.2@4326.54,3430 4326.54,3393.46 4340,3380 4390,3380 4413.46,3356.54 4413.46,3326.54 4450,3290 4540,3290 4560,3310 U10.10.13@4560,3372.36
NetC37.1_2: C37.1.2 R14.1.2 R16.1.2 R17.1.1 | length 388.3
  Top Layer w12: 4080,7586.54 4140,7586.54 C37.1.2@4166.54,7560 4166.54,7636.54 R17.1.1@4190,7660 ; R17.1.1@4186.54,7660 4226.54,7700 4300,7700 4326.54,7673.46 R14.1.2@4326.54,7660
NetC37.2_2: C37.2.2 R14.2.2 R16.2.2 R17.2.1 | length 363.8
  Top Layer w12: R16.2.2@4093.46,7070 C37.2.2@4166.54,7070 4166.54,7146.54 R17.2.1@4190,7170 ; R17.2.1@4186.54,7170 4226.54,7210 4300,7210 4326.54,7183.46 R14.2.2@4326.54,7170
NetC37.3_2: C37.3.2 R14.3.2 R16.3.2 R17.3.1 | length 388.3
  Top Layer w12: 4080,6606.54 4140,6606.54 C37.3.2@4166.54,6580 4166.54,6656.54 R17.3.1@4190,6680 ; R17.3.1@4186.54,6680 4226.54,6720 4300,6720 4326.54,6693.46 R14.3.2@4326.54,6680
NetC37.4_2: C37.4.2 R14.4.2 R16.4.2 R17.4.1 | length 377.5
  Top Layer w12: R16.4.2@4080,6086.54 4140,6086.54 C37.4.2@4166.54,6090 4166.54,6166.54 R17.4.1@4190,6190 ; R17.4.1@4186.54,6190 4226.54,6230 4300,6230 4326.54,6203.46 R14.4.2@4326.54,6190
NetC37.5_2: C37.5.2 R14.5.2 R16.5.2 R17.5.1 | length 407.3
  Top Layer w12: R16.5.2@4070,5700 R17.5.1@4186.54,5700 4226.54,5740 4300,5740 4326.54,5713.46 R14.5.2@4326.54,5700 ; C37.5.2@4166.54,5600 4166.54,5676.54 R17.5.1@4190,5700
NetC37.6_2: C37.6.2 R14.6.2 R16.6.2 R17.6.1 | length 423.8
  Top Layer w12: R16.6.2@4053.46,5170 R17.6.1@4186.54,5170 4226.54,5210 4300,5210 4326.54,5183.46 R14.6.2@4326.54,5170 ; C37.6.2@4166.54,5070 4166.54,5146.54 R17.6.1@4190,5170
NetC37.7_2: C37.7.2 R14.7.2 R16.7.2 R17.7.1 | length 388.3
  Top Layer w12: R16.7.2@4080,4606.54 4140,4606.54 C37.7.2@4166.54,4580 4166.54,4656.54 R17.7.1@4190,4680 ; R17.7.1@4186.54,4680 4226.54,4720 4300,4720 4326.54,4693.46 R14.7.2@4326.54,4680
NetC37.8_2: C37.8.2 R14.8.2 R16.8.2 R17.8.1 | length 357.3
  Top Layer w8: R16.8.2@4100,4090 C37.8.2@4166.54,4090
  Top Layer w12: C37.8.2@4166.54,4090 4166.54,4166.54 R17.8.1@4190,4190 ; R17.8.1@4186.54,4190 4226.54,4230 4300,4230 4326.54,4203.46 R14.8.2@4326.54,4190
NetC37.9_2: C37.9.2 R14.9.2 R16.9.2 R17.9.1 | length 388.3
  Top Layer w12: 4080,3626.54 4140,3626.54 C37.9.2@4166.54,3600 4166.54,3676.54 R17.9.1@4190,3700 ; R17.9.1@4186.54,3700 4226.54,3740 4300,3740 4326.54,3713.46 R14.9.2@4326.54,3700
NetC37.10_2: C37.10.2 R14.10.2 R16.10.2 R17.10.1 | length 388.3
  Top Layer w12: 4080,3136.54 4140,3136.54 C37.10.2@4166.54,3110 4166.54,3186.54 R17.10.1@4190,3210 ; R17.10.1@4186.54,3210 4226.54,3250 4300,3250 4326.54,3223.46 R14.10.2@4326.54,3210
NetC38.1_2: C38.1.2 R15.1.2 R18.1.2 R19.1.1 | length 411.4
  Top Layer w12: C38.1.2@4060,7786.54 4066.54,7780 R18.1.2@4166.54,7780 R15.1.2@4166.54,7880 ; 4166.54,7806.54 4180,7820 4280,7820 4320,7780 R19.1.1@4346.54,7780
NetC38.2_2: C38.2.2 R15.2.2 R18.2.2 R19.2.1 | length 411.4
  Top Layer w12: C38.2.2@4060,7296.54 4066.54,7290 R18.2.2@4166.54,7290 R15.2.2@4166.54,7390 ; 4166.54,7316.54 4180,7330 4280,7330 4320,7290 R19.2.1@4346.54,7290
NetC38.3_2: C38.3.2 R15.3.2 R18.3.2 R19.3.1 | length 411.4
  Top Layer w12: C38.3.2@4060,6806.54 4066.54,6800 R18.3.2@4166.54,6800 R15.3.2@4166.54,6900 ; 4166.54,6826.54 4180,6840 4280,6840 4320,6800 R19.3.1@4346.54,6800
NetC38.4_2: C38.4.2 R15.4.2 R18.4.2 R19.4.1 | length 411.4
  Top Layer w12: C38.4.2@4060,6316.54 4066.54,6310 R18.4.2@4166.54,6310 R15.4.2@4166.54,6410 ; 4166.54,6336.54 4180,6350 4280,6350 4320,6310 R19.4.1@4346.54,6310
NetC38.5_2: C38.5.2 R15.5.2 R18.5.2 R19.5.1 | length 411.4
  Top Layer w12: C38.5.2@4060,5826.54 4066.54,5820 R18.5.2@4166.54,5820 R15.5.2@4166.54,5920 ; 4166.54,5846.54 4180,5860 4280,5860 4320,5820 R19.5.1@4346.54,5820
NetC38.6_2: C38.6.2 R15.6.2 R18.6.2 R19.6.1 | length 411.4
  Top Layer w12: C38.6.2@4060,5296.54 4066.54,5290 R18.6.2@4166.54,5290 R15.6.2@4166.54,5390 ; 4166.54,5316.54 4180,5330 4280,5330 4320,5290 R19.6.1@4346.54,5290
NetC38.7_2: C38.7.2 R15.7.2 R18.7.2 R19.7.1 | length 411.4
  Top Layer w12: C38.7.2@4060,4806.54 4066.54,4800 R18.7.2@4166.54,4800 R15.7.2@4166.54,4900 ; 4166.54,4826.54 4180,4840 4280,4840 4320,4800 R19.7.1@4346.54,4800
NetC38.8_2: C38.8.2 R15.8.2 R18.8.2 R19.8.1 | length 411.4
  Top Layer w12: C38.8.2@4060,4316.54 4066.54,4310 R18.8.2@4166.54,4310 R15.8.2@4166.54,4410 ; 4166.54,4336.54 4180,4350 4280,4350 4320,4310 R19.8.1@4346.54,4310
NetC38.9_2: C38.9.2 R15.9.2 R18.9.2 R19.9.1 | length 411.4
  Top Layer w12: C38.9.2@4060,3826.54 4066.54,3820 R18.9.2@4166.54,3820 R15.9.2@4166.54,3920 ; 4166.54,3846.54 4180,3860 4280,3860 4320,3820 R19.9.1@4346.54,3820
NetC38.10_2: C38.10.2 R15.10.2 R18.10.2 R19.10.1 | length 411.4
  Top Layer w12: C38.10.2@4060,3336.54 4066.54,3330 R18.10.2@4166.54,3330 R15.10.2@4166.54,3430 ; 4166.54,3356.54 4180,3370 4280,3370 4320,3330 R19.10.1@4346.54,3330
NetC39.1_1: C39.1.1 R20.1.1 R24.1.1 U10.1.8 | length 535.8
  Top Layer w12: U10.1.8@4810,7822.36 4937.64,7822.36 C39.1.1@4970,7790 ; C39.1.1@4970,7780 5066.54,7876.54 R20.1.1@5066.54,7880 ; v1(5040,7680) R24.1.1@5086.54,7680 R24.1.1@5086.54,7683.46
  Bottom Layer w12: v1(5030,7840) 5050,7820 5050,7690 v1(5040,7680)
NetC39.1_2: C39.1.2 R23.1.2 U10.1.9 | length 411.7
  Top Layer w12: U10.1.9@4760,7822.36 4760,7770 4790,7740 4860,7740 4900,7780 C39.1.2@4906.54,7780 ; C39.1.2@4893.7,7770 4923.7,7740 5010,7740 5046.54,7776.54 R23.1.2@5046.54,7780
NetC39.2_1: C39.2.1 R20.2.1 R24.2.1 U10.2.8 | length 535.8
  Top Layer w12: U10.2.8@4810,7332.36 4937.64,7332.36 C39.2.1@4970,7300 ; C39.2.1@4970,7290 5066.54,7386.54 R20.2.1@5066.54,7390 ; v1(5040,7190) R24.2.1@5086.54,7190 R24.2.1@5086.54,7193.46
  Bottom Layer w12: v1(5030,7350) 5050,7330 5050,7200 v1(5040,7190)
NetC39.2_2: C39.2.2 R23.2.2 U10.2.9 | length 411.7
  Top Layer w12: U10.2.9@4760,7332.36 4760,7280 4790,7250 4860,7250 4900,7290 C39.2.2@4906.54,7290 ; C39.2.2@4893.7,7280 4923.7,7250 5010,7250 5046.54,7286.54 R23.2.2@5046.54,7290
NetC39.3_1: C39.3.1 R20.3.1 R24.3.1 U10.3.8 | length 535.8
  Top Layer w12: U10.3.8@4810,6842.36 4937.64,6842.36 C39.3.1@4970,6810 ; C39.3.1@4970,6800 5066.54,6896.54 R20.3.1@5066.54,6900 ; v1(5040,6700) R24.3.1@5086.54,6700 R24.3.1@5086.54,6703.46
  Bottom Layer w12: v1(5030,6860) 5050,6840 5050,6710 v1(5040,6700)
NetC39.3_2: C39.3.2 R23.3.2 U10.3.9 | length 411.7
  Top Layer w12: U10.3.9@4760,6842.36 4760,6790 4790,6760 4860,6760 4900,6800 C39.3.2@4906.54,6800 ; C39.3.2@4893.7,6790 4923.7,6760 5010,6760 5046.54,6796.54 R23.3.2@5046.54,6800
NetC39.4_1: C39.4.1 R20.4.1 R24.4.1 U10.4.8 | length 535.8
  Top Layer w12: U10.4.8@4810,6352.36 4937.64,6352.36 C39.4.1@4970,6320 ; C39.4.1@4970,6310 5066.54,6406.54 R20.4.1@5066.54,6410 ; v1(5040,6210) R24.4.1@5086.54,6210 R24.4.1@5086.54,6213.46
  Bottom Layer w12: v1(5030,6370) 5050,6350 5050,6220 v1(5040,6210)
NetC39.4_2: C39.4.2 R23.4.2 U10.4.9 | length 411.7
  Top Layer w12: U10.4.9@4760,6352.36 4760,6300 4790,6270 4860,6270 4900,6310 C39.4.2@4906.54,6310 ; C39.4.2@4893.7,6300 4923.7,6270 5010,6270 5046.54,6306.54 R23.4.2@5046.54,6310
NetC39.5_1: C39.5.1 R20.5.1 R24.5.1 U10.5.8 | length 535.8
  Top Layer w12: U10.5.8@4810,5862.36 4937.64,5862.36 C39.5.1@4970,5830 ; C39.5.1@4970,5820 5066.54,5916.54 R20.5.1@5066.54,5920 ; v1(5040,5720) R24.5.1@5086.54,5720 R24.5.1@5086.54,5723.46
  Bottom Layer w12: v1(5030,5880) 5050,5860 5050,5730 v1(5040,5720)
NetC39.5_2: C39.5.2 R23.5.2 U10.5.9 | length 411.7
  Top Layer w12: U10.5.9@4760,5862.36 4760,5810 4790,5780 4860,5780 4900,5820 C39.5.2@4906.54,5820 ; C39.5.2@4893.7,5810 4923.7,5780 5010,5780 5046.54,5816.54 R23.5.2@5046.54,5820
NetC39.6_1: C39.6.1 R20.6.1 R24.6.1 U10.6.8 | length 535.8
  Top Layer w12: U10.6.8@4810,5332.36 4937.64,5332.36 C39.6.1@4970,5300 ; C39.6.1@4970,5290 5066.54,5386.54 R20.6.1@5066.54,5390 ; v1(5040,5190) R24.6.1@5086.54,5190 R24.6.1@5086.54,5193.46
  Bottom Layer w12: v1(5030,5350) 5050,5330 5050,5200 v1(5040,5190)
NetC39.6_2: C39.6.2 R23.6.2 U10.6.9 | length 411.7
  Top Layer w12: U10.6.9@4760,5332.36 4760,5280 4790,5250 4860,5250 4900,5290 C39.6.2@4906.54,5290 ; C39.6.2@4893.7,5280 4923.7,5250 5010,5250 5046.54,5286.54 R23.6.2@5046.54,5290
NetC39.7_1: C39.7.1 R20.7.1 R24.7.1 U10.7.8 | length 535.8
  Top Layer w12: U10.7.8@4810,4842.36 4937.64,4842.36 C39.7.1@4970,4810 ; C39.7.1@4970,4800 5066.54,4896.54 R20.7.1@5066.54,4900 ; v1(5040,4700) R24.7.1@5086.54,4700 R24.7.1@5086.54,4703.46
  Bottom Layer w12: v1(5030,4860) 5050,4840 5050,4710 v1(5040,4700)
NetC39.7_2: C39.7.2 R23.7.2 U10.7.9 | length 411.7
  Top Layer w12: U10.7.9@4760,4842.36 4760,4790 4790,4760 4860,4760 4900,4800 C39.7.2@4906.54,4800 ; C39.7.2@4893.7,4790 4923.7,4760 5010,4760 5046.54,4796.54 R23.7.2@5046.54,4800
NetC39.8_1: C39.8.1 R20.8.1 R24.8.1 U10.8.8 | length 535.8
  Top Layer w12: U10.8.8@4810,4352.36 4937.64,4352.36 C39.8.1@4970,4320 ; C39.8.1@4970,4310 5066.54,4406.54 R20.8.1@5066.54,4410 ; v1(5040,4210) R24.8.1@5086.54,4210 R24.8.1@5086.54,4213.46
  Bottom Layer w12: v1(5030,4370) 5050,4350 5050,4220 v1(5040,4210)
NetC39.8_2: C39.8.2 R23.8.2 U10.8.9 | length 411.7
  Top Layer w12: U10.8.9@4760,4352.36 4760,4300 4790,4270 4860,4270 4900,4310 C39.8.2@4906.54,4310 ; C39.8.2@4893.7,4300 4923.7,4270 5010,4270 5046.54,4306.54 R23.8.2@5046.54,4310
NetC39.9_1: C39.9.1 R20.9.1 R24.9.1 U10.9.8 | length 535.8
  Top Layer w12: U10.9.8@4810,3862.36 4937.64,3862.36 C39.9.1@4970,3830 ; C39.9.1@4970,3820 5066.54,3916.54 R20.9.1@5066.54,3920 ; v1(5040,3720) R24.9.1@5086.54,3720 R24.9.1@5086.54,3723.46
  Bottom Layer w12: v1(5030,3880) 5050,3860 5050,3730 v1(5040,3720)
NetC39.9_2: C39.9.2 R23.9.2 U10.9.9 | length 411.7
  Top Layer w12: U10.9.9@4760,3862.36 4760,3810 4790,3780 4860,3780 4900,3820 C39.9.2@4906.54,3820 ; C39.9.2@4893.7,3810 4923.7,3780 5010,3780 5046.54,3816.54 R23.9.2@5046.54,3820
NetC39.10_1: C39.10.1 R20.10.1 R24.10.1 U10.10.8 | length 535.8
  Top Layer w12: U10.10.8@4810,3372.36 4937.64,3372.36 C39.10.1@4970,3340 ; C39.10.1@4970,3330 5066.54,3426.54 R20.10.1@5066.54,3430 ; v1(5040,3230) R24.10.1@5086.54,3230 R24.10.1@5086.54,3233.46
  Bottom Layer w12: v1(5030,3390) 5050,3370 5050,3240 v1(5040,3230)
NetC39.10_2: C39.10.2 R23.10.2 U10.10.9 | length 411.7
  Top Layer w12: U10.10.9@4760,3372.36 4760,3320 4790,3290 4860,3290 4900,3330 C39.10.2@4906.54,3330 ; C39.10.2@4893.7,3320 4923.7,3290 5010,3290 5046.54,3326.54 R23.10.2@5046.54,3330
NetC40.1_2: C40.1.2 R25.1.2 U10.1.6 | length 553.6
  Top Layer w12: U10.1.6@4760,7617.64 4760,7560 4790,7530 5120,7530 5153.46,7563.46 R25.1.2@5153.46,7580 ; 4970,7530 4993.46,7553.46 C40.1.2@4993.46,7580
NetC40.2_2: C40.2.2 R25.2.2 U10.2.6 | length 553.6
  Top Layer w12: U10.2.6@4760,7127.64 4760,7070 4790,7040 5120,7040 5153.46,7073.46 R25.2.2@5153.46,7090 ; 4970,7040 4993.46,7063.46 C40.2.2@4993.46,7090
NetC40.3_2: C40.3.2 R25.3.2 U10.3.6 | length 553.6
  Top Layer w12: U10.3.6@4760,6637.64 4760,6580 4790,6550 5120,6550 5153.46,6583.46 R25.3.2@5153.46,6600 ; 4970,6550 4993.46,6573.46 C40.3.2@4993.46,6600
NetC40.4_2: C40.4.2 R25.4.2 U10.4.6 | length 553.6
  Top Layer w12: U10.4.6@4760,6147.64 4760,6090 4790,6060 5120,6060 5153.46,6093.46 R25.4.2@5153.46,6110 ; 4970,6060 4993.46,6083.46 C40.4.2@4993.46,6110
NetC40.5_2: C40.5.2 R25.5.2 U10.5.6 | length 553.6
  Top Layer w12: U10.5.6@4760,5657.64 4760,5600 4790,5570 5120,5570 5153.46,5603.46 R25.5.2@5153.46,5620 ; 4970,5570 4993.46,5593.46 C40.5.2@4993.46,5620
NetC40.6_2: C40.6.2 R25.6.2 U10.6.6 | length 553.6
  Top Layer w12: U10.6.6@4760,5127.64 4760,5070 4790,5040 5120,5040 5153.46,5073.46 R25.6.2@5153.46,5090 ; 4970,5040 4993.46,5063.46 C40.6.2@4993.46,5090
NetC40.7_2: C40.7.2 R25.7.2 U10.7.6 | length 553.6
  Top Layer w12: U10.7.6@4760,4637.64 4760,4580 4790,4550 5120,4550 5153.46,4583.46 R25.7.2@5153.46,4600 ; 4970,4550 4993.46,4573.46 C40.7.2@4993.46,4600